# Altium PCB PiMX8MP_r0.3.PcbDoc (part 3 of 10)
Units mm, origin at the board's own origin, x right, y up, seen from the top; angles counter-clockwise.
Board outline 55 x 40 mm, 10 copper layers (Top Layer, Layer 1, Layer 2, Layer 3, Layer 4, Layer 5, Layer 6, Layer 7, Layer 8, Bottom Layer), stack 1.472 mm thick; 545 components, 477 nets, 2606 pads, 2278 vias.
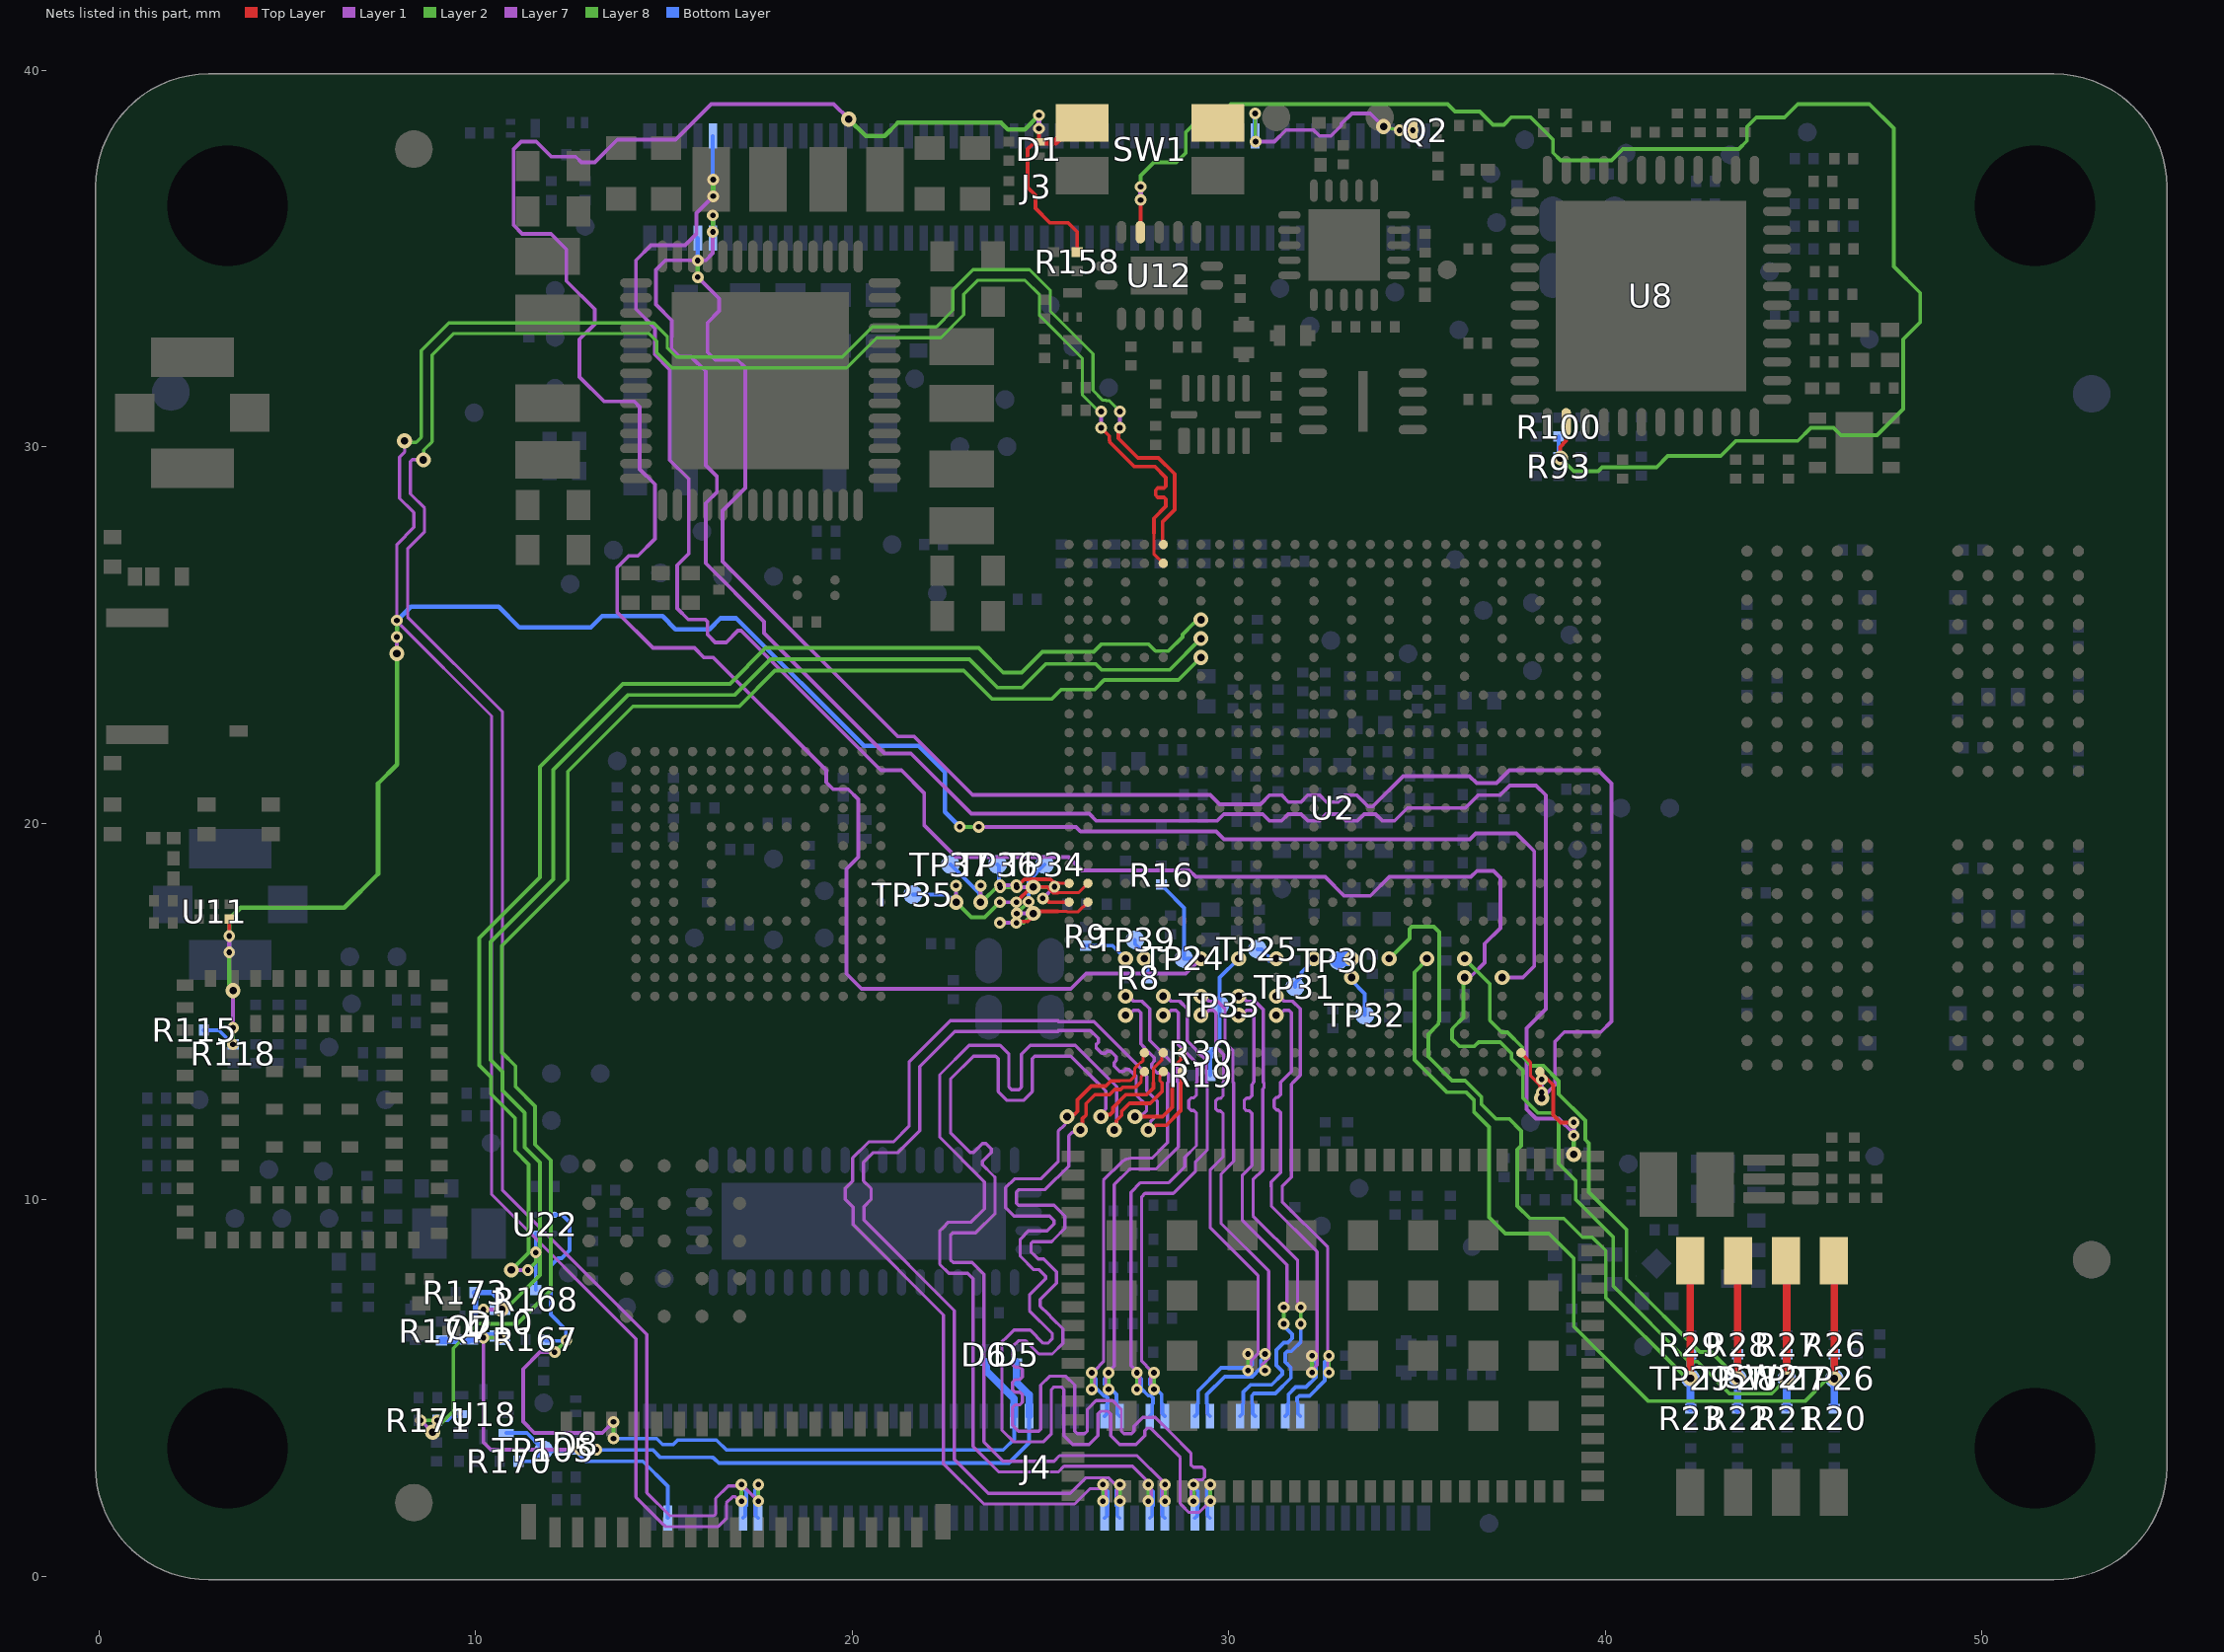
[diagram p11: the nets of this part, all layers, seen from the top]

## Part data (continued)
C24 C34 C35 C36 C37 C38 C41 C42 C43 C44 C45 C46 C47 C50 C51 C52 C53 C54 C55 C56 C58 C61 C62 C63 C65 C66 C67 C68 C70 C71 C72 C74 C75 C76 C77 C78 C79 C80 C83 C84 C85 C86 C87 C88 C89 C92 C93 C94 C95 C96 C97 C98 C99 C101 C102 C103 C104 C107 C108 C117 C118 C119 C120 C123 C124 C125 C126 C127 C128 C131 C132 C133 C134 C135 C136 C137 C138 C139 C140 C141 C142 C143 C144 C145 C146 C147 C148 C149 C150 C151 C152 C153 C154 C155 C156 C157 C158 C159 C160 C161 C162 C163 C164 C167 C175 C180 C182 C192 C195 C197 C198: library part CAP_0201_1uF_6.3V, "Multilayer Ceramic Capacitors MLCC - SMD/SMT 0201 6.3VDC", Manufacturer 1="Murata Electronics", Manufacturer 1 Prt. Nr.=GRM033R60J105MEA2D, Manufacturer 2="Samsung Electro-Mechanics", Manufacturer 2 Prt. Nr.=CL03A105MQ3CSNC
C27 C30 C105 C106 C110 C111 C112 C113 C176 C177: library part CAP_0201_100nF_10V, "Multilayer Ceramic Capacitors MLCC - SMD/SMT 0201 10VDC", Manufacturer 1="Murata Electronics", Manufacturer 1 Prt. Nr.=GRT033R61A104KE01J, Manufacturer 2="Samsung Electro-Mechanics", Manufacturer 2 Prt. Nr.=CL03A104MP3NNNC
C39 C40 C48 C49 C57 C59 C60 C64 C69 C73 C81 C82 C90 C91 C100: library part CAP_0402_10µ_6.3V, "Multilayer Ceramic Capacitors MLCC - SMD/SMT 0402 6.3VDC", Manufacturer 1="KYOCERA AVX", Manufacturer 1 Prt. Nr.=KGM05CS60J106MH, Manufacturer 2=Murata, Manufacturer 2 Prt. Nr.=GRT155C80J106ME13J
C109: library part CAP_0201_15pF_25V, "Multilayer Ceramic Capacitors MLCC - SMD/SMT 0201 25VDC", Manufacturer 1="Murata Electronics", Manufacturer 1 Prt. Nr.=GCM0335C1E150FA16J, Manufacturer 2=KEMET, Manufacturer 2 Prt. Nr.=C0201C150J3GACTU
C114: library part CAP_0201_10nF_25V, "Multilayer Ceramic Capacitors MLCC - SMD/SMT 0201 25VDC", Manufacturer 1="Murata Electronics", Manufacturer 1 Prt. Nr.=GRM033C81E103KE14D, Manufacturer 2=AVX, Manufacturer 2 Prt. Nr.=02013C103KAT2A
C168 C173 C174: library part CAP_0402_OPT, "Optional Capacitor 0402"
C169: library part CAP_0201_OPT, "Optional Capacitor 0201"
C171: library part CAP_0402_1pF_50V, "Multilayer Ceramic Capacitors MLCC - SMD/SMT 0402 50VDC", Manufacturer 1="Murata Electronics", Manufacturer 1 Prt. Nr.=GJM1555C1H1R0BB01J, Manufacturer 2=KEMET, Manufacturer 2 Prt. Nr.=CBR04C109A5GAC
C172: library part CAP_0402_1.2pF_50V, "Multilayer Ceramic Capacitors MLCC - SMD/SMT 0402 50VDC", Manufacturer 1="Murata Electronics", Manufacturer 1 Prt. Nr.=GJM1555C1H1R2CB01D, Manufacturer 2=KEMET, Manufacturer 2 Prt. Nr.=CBR04C129A5GAC
C186: library part CAP_0201_120pF_50V, "Multilayer Ceramic Capacitors MLCC - SMD/SMT 0201 50VDC", Manufacturer 1="Murata Electronics", Manufacturer 1 Prt. Nr.=GRT0335C1H121FA02D, Manufacturer 2 Prt. Nr.=GRM0335C1H121FA01D, Manufacturer 2="Murata Electronics"
C189 C196: library part CAP_0201_470nF_10V, "Multilayer Ceramic Capacitors MLCC - SMD/SMT 0201 10VDC", Manufacturer 1="Taiyo Yuden", Manufacturer 1 Prt. Nr.=LMK063BBJ474KPLF, Manufacturer 2=TDK, Manufacturer 2 Prt. Nr.=C0603X5R1A474M030BC
C193 C194: library part CAP_0201_33nF_10V, "Multilayer Ceramic Capacitors MLCC - SMD/SMT 0201 10VDC", Manufacturer 1="Murata Electronics", Manufacturer 1 Prt. Nr.=GRM033R61A333KE84E, Manufacturer 2=YAGEO, Manufacturer 2 Prt. Nr.=CC0201KRX5R6BB333
D1: library part "ESD Protection Diode_3.3V_VS3V3BA1EST15R", "ESD Diode Suppressors Bidirectional 3.3V working voltage 0201", Manufacturer 1="ROHM Semiconductor", Manufacturer 1 Prt. Nr.=VS3V3BA1EST15R
D2 D4 D7 D10 D11: library part "Schottky 40V_200mA_BAS40L-G3-08", "Schottky Diodes & Rectifiers", Manufacturer 1=Vishay, Manufacturer 1 Prt. Nr.=BAS40L-G3-08
D3 D5 D6 D8 D9: library part "ESD Protection Diode_5V_VS5V0BA1EST15R", "ESD Diode Suppressors Bidirectional 5V working voltage 0201", Manufacturer 1="ROHM Semiconductor", Manufacturer 1 Prt. Nr.=VS5V0BA1EST15R
J1 J2: library part U.FL_CONMHF1-SMD, "U.FL Type Jack PCB SMD RF Connector", Manufacturer 1="Linx Technologies", Manufacturer 1 Prt. Nr.=CONMHF1-SMD
J3 J4: library part "Board to Board Connector_DF40C-100DP-0.4V(51)", "Board to Board connector 100Pol Stacking Header 0.4mm Pitch", Manufacturer 1="Hirose Connector", Manufacturer 1 Prt. Nr.=DF40C-100DP-0.4V(51)
J5: library part "FFC Connector_33pol_FH35C-33S-0.3SHW", "FFC Connector 33pol 0.3mm Pitch Double Sided Contacts", Manufacturer 1="Hirose Connector", Manufacturer 1 Prt. Nr.=FH35C-33S-0.3SHW(99)
J6: library part D-FLOP_SMG-W-2,0x1,2x1,25-AU, "D-type flip-flop with differential output and async set- and reset input", Manufacturer 1=Nexperia, Manufacturer 1 Prt. Nr.=74AUP1G74GT,115
L1 L2 L3 L4 L5 L6 L10: library part "IND_DFE-P 2016_0.47µH_3.7A", "Fixed Inductors DFE-P 2016 0.47uH 3.7A 20% 33mOhms HiCur", Manufacturer 1="Murata Electronics", Manufacturer 1 Prt. Nr.=DFE201612P-R47M=P2
L7 L8: library part BEAD_0201_120Ohm_900mA, "Ferrite Bead 0201 120Ohm 900mA", Manufacturer 1="Murata Electronics", Manufacturer 1 Prt. Nr.=BLM03PX121SN1D
L9: library part IND_LQM21_2.2µH_950mA, "Fixed Inductors LQM21 2.2uH 950mA 20% 180mOhms", Manufacturer 1="Murata Electronics", Manufacturer 1 Prt. Nr.=LQM21PN2R2MGSD
L11 L12 L13: library part BEAD_0201_330Ohm_305mA, "Ferrite Bead 0201 330Ohm 305mA", Manufacturer 1="Murata Electronics", Manufacturer 1 Prt. Nr.=NFZ03SG331SN10D
L14: library part HF_INDC_0201_1.0nH_600mA, "0201 HF Inductor", Manufacturer 1=Abracon, Manufacturer 1 Prt. Nr.=AIMC-06UHQ-1N0B-T, Manufacturer 2=TDK, Manufacturer 2 Prt. Nr.=MLG0603S1N0BTD25
L15: library part HF_INDC_0201_1.2nH_1.1A, "0201 HF Inductor", Manufacturer 1=Abracon, Manufacturer 1 Prt. Nr.=AIMC-06UHQ-1N2B-T, Manufacturer 2=Murata, Manufacturer 2 Prt. Nr.=LQP03HQ1N2C02D
NT1 NT2: library part NetTie_0.2mm, "Net Tie Element"
Q1 Q2 Q3 Q4 Q5 Q7: library part "N-Channel MOSFET_SSM3K15ACT,L3F", "MOSFET 30V SGL N-CH TRENCHMOS Logic Level", Manufacturer 1=Toshiba, Manufacturer 1 Prt. Nr.=SSM3K15ACT,L3F
R1 R2 R20 R21 R22 R23 R31 R32 R33 R34 R35 R36 R42 R43 R44 R45 R48 R51 R112 R123 R124 R125 R127 R128 R136 R137 R138 R139 R140 R141 R142 R143 R144 R145 R146 R147 R149 R150 R158 R159 R186: library part RES_0201_0R_1%, "Thick Film Resistors - SMD 0R OHM 1%", Manufacturer 1=Yageo, Manufacturer 1 Prt. Nr.=RC0201FR-070RL, Manufacturer 2="Vishay / Dale", Manufacturer 2 Prt. Nr.=CRCW02010000Z0ED
R3 R73 R84 R85 R86 R87 R88 R89 R99 R100 R101 R102 R103 R104: library part RES_0201_1k_1%, "Thick Film Resistors - SMD 1K OHM 1%", Manufacturer 1=Yageo, Manufacturer 1 Prt. Nr.=RC0201FR-071KL, Manufacturer 2="Vishay / Dale", Manufacturer 2 Prt. Nr.=CRCW02011K00FNED
R4 R5 R6 R16 R17 R18 R24 R26 R27 R28 R29 R132 R134 R152 R156 R160 R162 R164 R167 R173: library part RES_0201_100k_1%, "Thick Film Resistors - SMD 100K OHM 1%", Manufacturer 1=Yageo, Manufacturer 1 Prt. Nr.=RC0201FR-07100KL, Manufacturer 2="Vishay / Dale", Manufacturer 2 Prt. Nr.=CRCW0201100KFNED
R7 R37 R38 R66 R153 R175 R176: library part RES_0201_4.7k_1%, "Thick Film Resistors - SMD 4.7K OHM 1%", Manufacturer 1=Yageo, Manufacturer 1 Prt. Nr.=RC0201JR-074K7P, Manufacturer 2="Vishay / Dale", Manufacturer 2 Prt. Nr.=CRCW02014K70FNED
R8 R76 R77 R78 R79 R81 R82 R90 R98 R113 R114 R116 R177 R178 R179 R180 R181 R182: library part RES_0201_22R_1%, "Thick Film Resistors - SMD 22R OHM 1%", Manufacturer 1=Yageo, Manufacturer 1 Prt. Nr.=RC0201FR-0722RL, Manufacturer 2="Vishay / Dale", Manufacturer 2 Prt. Nr.=CRCW020122R0FNED
R9: library part RES_0201_402R_1%, "Thick Film Resistors - SMD 402 OHM 1%", Manufacturer 1=Yageo, Manufacturer 1 Prt. Nr.=AC0201FR-07402RL, Manufacturer 2="Vishay / Dale", Manufacturer 2 Prt. Nr.=CRCW0201402RFKED
R10 R25 R30 R40 R49 R50 R52 R53 R58 R59 R60 R61 R62 R63 R64 R65 R67 R68 R69 R70 R71 R72 R74 R75 R92 R93 R94 R95 R96 R97 R107 R108 R109 R110 R111 R115 R118 R119 R120 R121 R131 R135 R148 R151 R154 R155 R157 R161 R163 R165 R168 R171 R172 R183 R185: library part RES_0201_10k_1%, "Thick Film Resistors - SMD 10K OHM 1%", Manufacturer 1=Yageo, Manufacturer 1 Prt. Nr.=RC0201FR-0710KL, Manufacturer 2="Vishay / Dale", Manufacturer 2 Prt. Nr.=CRCW020110K0FNED
R11 R54 R55: library part RES_0201_240R_1%, "Thick Film Resistors - SMD 240 OHM 1%", Manufacturer 1=Yageo, Manufacturer 1 Prt. Nr.=RC0201FR-07240RL, Manufacturer 2="Vishay / Dale", Manufacturer 2 Prt. Nr.=CRCW0201240RFNED
R12 R13 R14 R15: library part RES_0201_2.1k_1%, "Thick Film Resistors - SMD 2.1K OHM 1%", Manufacturer 1=Panasonic, Manufacturer 1 Prt. Nr.=ERJ-1GNF2101C, Manufacturer 2=Yageo, Manufacturer 2 Prt. Nr.=RC0201FR-072K1L
R19: library part RES_0201_2.4k_1%, "Thick Film Resistors - SMD 2.4K OHM 1%", Manufacturer 1=Bourns, Manufacturer 1 Prt. Nr.=CR0201AFW-2401GAS, Manufacturer 2=Yageo, Manufacturer 2 Prt. Nr.=RC0201FR-072K4L
R39 R41: library part RES_0201_8.2k_1%, "Thick Film Resistors - SMD 8.2K OHM 1%", Manufacturer 1=Yageo, Manufacturer 1 Prt. Nr.=RC0201FR-078K2L, Manufacturer 2="Vishay / Dale", Manufacturer 2 Prt. Nr.=CRCW02018K20FNED
R46 R47: library part RES_0201_200R_1%, "Thick Film Resistors - SMD 200 OHM 1%", Manufacturer 1=Yageo, Manufacturer 1 Prt. Nr.=RC0201FR-07200RL, Manufacturer 2="Vishay / Dale", Manufacturer 2 Prt. Nr.=CRCW0201200RFNED
R56 R57: library part RES_0201_150R_1%, "Thick Film Resistors - SMD 150 OHM 1%", Manufacturer 1=Yageo, Manufacturer 1 Prt. Nr.=RC0201FR-07150RL, Manufacturer 2="Vishay / Dale", Manufacturer 2 Prt. Nr.=CRCW0201150RFNED
R80 R83 R122 R126 R129 R133: library part RES_0402_0R_1%, "Thick Film Resistors - SMD 0OHM 1%", Manufacturer 1=Bourns, Manufacturer 1 Prt. Nr.=CR0402AJ/-000GAS, Manufacturer 2=YAGEO, Manufacturer 2 Prt. Nr.=AC0402FR-070RL
R91: library part RES_0201_6.04k_1%, "Thick Film Resistors - SMD 6.04K OHM 1%", Manufacturer 1=Yageo, Manufacturer 1 Prt. Nr.=RC0201FR-076K04L, Manufacturer 2="Vishay / Dale", Manufacturer 2 Prt. Nr.=CRCW02016K04FNED
R105 R106 R169 R170: library part RES_0201_1.8k_1%, "Thick Film Resistors - SMD 1.8K OHM 1%", Manufacturer 1=Panasonic, Manufacturer 1 Prt. Nr.=ERJ-1GNF1801C, Manufacturer 2="Vishay / Dale", Manufacturer 2 Prt. Nr.=CRCW02011K80FKED
R117: library part RES_0201_4.75k_1%, "Thick Film Resistors - SMD 4.75K OHM 1%", Manufacturer 1=Yageo, Manufacturer 1 Prt. Nr.=AC0201FR-074K75L, Manufacturer 2="Vishay / Dale", Manufacturer 2 Prt. Nr.=CRCW02014K75FNED
R130: library part RES_0201_453k_1%, "Thick Film Resistors - SMD 453K OHM 1%", Manufacturer 1=Yageo, Manufacturer 1 Prt. Nr.=RC0201FR-07453KL, Manufacturer 2="Vishay / Dale", Manufacturer 2 Prt. Nr.=CRCW0201453KFKED
R174: library part RES_0201_24k_1%, "Thick Film Resistors - SMD 24K OHM 1%", Manufacturer 1=Yageo, Manufacturer 1 Prt. Nr.=RC0201FR-0724KL, Manufacturer 2="Vishay / Dale", Manufacturer 2 Prt. Nr.=CRCW020124K0FKED
R184: library part RES_0201_12k_1%, "Thick Film Resistors - SMD 12K OHM 1%", Manufacturer 1=Yageo, Manufacturer 1 Prt. Nr.=RC0201FR-0712KL, Manufacturer 2="Vishay / Dale", Manufacturer 2 Prt. Nr.=CRCW020112K0FKED
SW1: library part SW_TACTILE_EVQ-P7J01P, "SMD Switch Tactile SMD 3.2mm X 2.9mm", Manufacturer 1=Panasonic, Manufacturer 1 Prt. Nr.=EVQ-P7J01P
SW2: library part SW_DIP_97C04SRT, "SMD Switch DIP SMD 1.27mm 4 Pos.", Manufacturer 1="Grayhill Inc.", Temperature Range="-40°C - 85°C", Manufacturer 1 Prt. Nr.=97C04SRT
U1: library part "PMIC 6A 5.5V_PCA9450CHN", "5.5V, 6A, Low I Q ,Synchronous Buck Converter PMIC", Manufacturer 1="NXP Semiconductors", Manufacturer 1 Prt. Nr.=PCA9450CHN
U2: library part "SoC_i.MX 8M Plus_Quad", "i.MX 8M Plus Applications Processor  for Industrial Products", Manufacturer 1="NXP Semiconductor", Manufacturer 1 Prt. Nr.=MIMX8ML8CVNKZAB
U3: library part "Quad_Bidirectional_LvL Shift_LSF0204GU12X", "4-bit bidirectional multi-voltage level translator", Manufacturer 1=Nexperia, Temperature Range="-40°C - 125°C", Manufacturer 1 Prt. Nr.=LSF0204GU12X
U4: library part LPDDR4_MT53E1536M32D4DE-046-AIT-C, "DRAM LPDDR4 48G 1.5GX32 FBGA QDP", Manufacturer 1=Micron, Manufacturer 1 Prt. Nr.=MT53E1536M32D4DE-046-AIT-C
U5: library part eMMC_SDINBDG4-16G-I1, "iNAND eMMC 16GB", Manufacturer 1=SanDisk, Manufacturer 1 Prt. Nr.=SDINBDG4-16G-I1
U6: library part NOR_Flash_IS25WP064A-RHLE, "NOR Flash 64Mbit", Manufacturer 1=ISSI, Manufacturer 1 Prt. Nr.=IS25WP064A-RHLE
U7: library part NOR_Flash_W25Q16, "NOR Flash spiFlash, 3V, 16M-bit, 4Kb Uniform Sector, DTR", Manufacturer 1=Winbond, Temperature Range="-40°C - 85°C", Manufacturer 1 Prt. Nr.="W25Q16JVUXIQ TR"
U8: library part "Ethernet Phy 1000Base_LAN8840-V/PSA", "Precision IEEE1588v2 Integrated 10/100/1000M Ethernet precision Transdceiver", Manufacturer 1="Microchip Technology", Temperature Range=-40°C-105°C, Manufacturer 1 Prt. Nr.=LAN8840-V/PSA
U9: library part "LDO 1.1V_TLV73311PQDRVRQ1", "LDO voltage regulator 300mA WSON-6", Manufacturer 1="Texas Instruments", Temperature Range=-40°C-150°C, Manufacturer 1 Prt. Nr.=TLV73311PQDRVRQ1
U10: library part WIFI_BLE_Module_LBEE5PK2BC, "Shielded Ultra Small Wi-Fi® 11a/b/g/n/ac + Bluetooth® 5.2 Module2.4GHz/5GHz Wi-Fi® + Bluetooth® Module", Manufacturer 1=Murata, Temperature Range="-20°C - 70°C", Manufacturer 1 Prt. Nr.=LBEE5PK2BC
U11: library part "RF Analog SW 2:1_BGS12P2L6", "SPDT 2-channel analog multiplexer/demultiplexer EF 6GHz Bandwidth", Manufacturer 1=Infineon, Manufacturer 1 Prt. Nr.=BGS12P2L6E6327XTSA1
U12: library part Hex_Schmitt-Buffer_LvL-Shift_SN74LV6T17, "Hex Schmitt-Trigger Buffer with Integrated Translation", Manufacturer 1="NXP Semiconductors", Manufacturer 1 Prt. Nr.=SN74LV6T17BQAR
U13: library part TPU_Google_Edge_TPU, "Google Coral accelerator module, 4TOPs peak performace, PCIe Gen 2x1 & USB2.0 HS", Manufacturer=Coral, Manufacturer Part Number=G313-06329-00
U14: library part "Buck 4A 5.5V_TLV62595DMQR", "5.5V, 4A, Adjustable ,Synchronous Buck Converter", Manufacturer 1="Texas Instruments", Manufacturer 1 Prt. Nr.=TLV62595DMQR
U15: library part "LDO 1.8V_TLV74018PDQNR", "LDO voltage regulator 300mA X2SON", Manufacturer 1="Texas Instruments", Manufacturer 1 Prt. Nr.=TLV74018PDQNR
U16: library part "High Speed MUX 12x1:2_TS3DV642A0RUAR", "High-speed differential switch 12x2:1 for TMDS and generel LVDS signal switching", Manufacturer 1="Texas Instruments", Manufacturer 1 Prt. Nr.=TS3DV642A0RUAR
U17: library part "Secure Element I2C_SE051", "Secure Element Plug & Trust SE051", Manufacturer 1="NXP Semiconductors", Manufacturer 1 Prt. Nr.=SE051C2HQ1/Z01XDZ
U18: library part "I2C_Bidirectional_LvL Shift_PCA9509GM", "Level SHifter Dual Channel Bidirectional for I2C up to 400kHz", Manufacturer 1="NXP Semiconductors", Manufacturer 1 Prt. Nr.=PCA9509GM,125
U19: library part "MEMS Oscillator_SiTime_SiT1532AI-J4-D14-32.768E", "10 ppm Ultra-Low Power 32.768 kHz XTAL Replacement", Manufacturer 1=SiTime, Manufacturer 1 Prt. Nr.=SiT1532AI-J4-D14-32.768E
U20: library part "MEMS Oscillator_Microchip_DSC1001DI5-024.0000", "1.8V-3.3V Low-Power Precision CMOS Oscillators /  / Stability: ±10 ppm  / Output load: 10pF", Manufacturer 1="Microchip Technology", Manufacturer 1 Prt. Nr.=DSC1001DI5-024.0000
U21: library part "MEMS Oscillator_Microchip_DSC1001DI5-025.0000", "1.8V-3.3V Low-Power Precision CMOS Oscillators /  / Stability: ±10 ppm  / Output load: 10pF", Manufacturer 1="Microchip Technology", Manufacturer 1 Prt. Nr.=DSC1001DI5-025.0000
U22: library part Buffer_SN74LVC1G17YZVR, "Single Buffer SN74LVC1G17DPWR", Manufacturer 1="Texas Instruments", Manufacturer 1 Prt. Nr.=SN74LVC1G17YZVR

## Free pads (board coordinates)
  round 1 smd far side mask+0.5: FD(1.912,31.454) FD(52.912,8.404) FD(52.912,31.404)
  round 1 smd mask+0.5: FD(8.362,37.904) FD(8.362,1.954) FD(52.912,8.404)
  oval 1x1.05 hole 3.2 unplated mask+2.4: MT(3.412,3.404) MT(3.412,36.404) MT(51.412,36.404) MT(51.412,3.404)

## Via types
v1: diameter 0.4, hole 0.2, Top Layer to Bottom Layer, tented both sides, 946 vias
v2: diameter 0.31, hole 0.15, Top Layer to Layer 1, tented both sides, 321 vias
v3: diameter 0.31, hole 0.15, Layer 8 to Bottom Layer, tented both sides, 315 vias
v4: diameter 0.31, hole 0.15, Layer 1 to Layer 2, tented both sides, 257 vias
v5: diameter 0.31, hole 0.15, Layer 7 to Layer 8, tented both sides, 198 vias
v6: diameter 0.4, hole 0.2, Layer 2 to Layer 7, tented both sides, 169 vias
v7: diameter 0.31, hole 0.15, Top Layer to Layer 1, tented top, 72 vias

## Nets (pads, with @x,y where several pads share a name; then routed paths per layer and width w, separated by ;. In a path a pad name is that pad's centre, name@x,y a point inside that pad or via, vN(x,y) a via of type N, cw(c..) or ccw(c..) an arc to the next point about the centre after c; other vN are vias at no path point)
8M_24M_XTALI: R8.1 TP39.TP U2.G25 | length 1.1
  Bottom Layer w0.1: TP39.TP@27.512,16.904 27.512,16.796 27.705,16.604 27.705,16.462 v1(27.762,16.404) ; v1@27.75,16.4 27.75,16.335 27.85,16.235 R8.1@27.85,15.9
8M_24M_XTALO: R9.1 U2.G26 | length 1.3
  Bottom Layer w0.1: R9.1@26.118,16.75 26.917,16.75 v1(27.262,16.404)
8M_BOOT_MODE0: R20.1 R26.2 SW2.5 TP26.TP U2.G10 | length 24.8
  Top Layer w0.2: v1(46.086,5.25) SW2.5@46.086,8.086
  Layer 2 w0.1: v1(35.262,16.404) 35.262,16.371 34.932,16.041 34.932,13.718 35.796,12.854 36.307,12.854 36.512,12.649 36.512,12.335 36.917,11.93 36.917,9.533 37.346,9.104 38.507,9.104 39.162,8.449 39.162,6.638 41.15,4.65 45.3,4.65 45.845,5.195 v1@46.095,5.195
  Bottom Layer w0.2: R20.1@46.086,4.514 v1(46.086,5.25) R26.2@46.086,5.9
8M_BOOT_MODE1: J3.93 R21.1 R27.2 SW2.6 TP27.TP U2.F8 | length 65.5
  Top Layer w0.2: v1(44.818,5.25) SW2.6@44.818,8.132
  Layer 2 w0.1: v1(36.262,15.904) 36.232,15.874 36.232,14.841 35.952,14.561 35.952,14.543 35.932,14.523 35.932,14.268 36.126,14.074 36.524,14.074 36.639,14.189 37.211,14.189 37.511,13.889 37.511,13.739 37.812,13.438 37.812,12.704 38.212,12.304 38.562,12.304 38.762,12.104 38.762,10.954 39.212,10.504 39.212,10.004 40.212,9.004 40.212,7.704 42.217,5.7 42.45,5.7 43.3,4.85 44.418,4.85 v1(44.818,5.25)
  Layer 7 w0.1: v5(16.312,36.654) 15.862,36.204 15.862,35.654 15.562,35.354 14.662,35.354 14.262,34.954 14.262,33.655 14.762,33.154 14.762,32.454 15.162,32.054 15.162,29.645 15.662,29.145 15.662,27.164 15.352,26.854 15.352,25.71 15.651,25.412 16.104,25.412 16.162,25.353 16.162,25.009 16.367,24.804 16.657,24.804 16.968,25.116 17.051,25.116 20.762,21.404 21.312,21.404 21.912,20.804 21.912,19.954 22.762,19.104 25.462,19.104 25.746,19.104 26.1,18.75 28.95,18.75 29.126,18.574 32.562,18.574 33.062,18.074 33.762,18.074 34.262,18.574 36.432,18.574 36.592,18.734 37.032,18.734 37.212,18.554 37.212,17.212 36.8,16.8 36.8,16.3 36.462,15.962 36.32,15.962 v1(36.262,15.904)
  Layer 8 w0.12: v5(16.312,36.654) v3(16.312,37.094)
  Bottom Layer w0.1: v3@16.3,37.1 16.3,38.252 J3.93@16.302,38.254
  Bottom Layer w0.2: R21.1@44.818,4.468 v1(44.818,5.25) ; TP27.TP@44.818,5.232 R27.2@44.818,5.9
8M_BOOT_MODE2: R22.1 R28.2 SW2.7 TP28.TP U2.G8 | length 18.9
  Top Layer w0.2: v1(43.517,5.25) SW2.7@43.517,8.117
  Layer 2 w0.1: v1(36.262,16.404) 36.932,15.734 36.932,14.768 37.126,14.574 37.25,14.45 37.4,14.45 37.8,14.05 37.8,13.8 38.046,13.554 38.362,13.554 38.762,13.154 38.762,12.804 39.467,12.099 39.467,11.599 39.562,11.504 39.562,10.204 40.562,9.204 40.562,7.904 42.512,5.954 42.812,5.954 v1(43.517,5.25)
  Bottom Layer w0.2: R22.1@43.517,4.417 v1(43.517,5.25) ; TP28.TP@43.517,5.317 R28.2@43.517,5.9
8M_BOOT_MODE3: R23.1 R29.2 SW2.8 TP29.TP U2.G12 | length 22.6
  Top Layer w0.2: v1@42.257,5.207 SW2.8@42.257,8.379
  Layer 2 w0.1: v1(34.262,16.404) 34.8,16.942 34.8,17.191 34.859,17.25 35.45,17.25 35.592,17.108 35.592,14.747 35.57,14.725 35.57,14.67 35.3,14.4 35.3,13.8 35.935,13.165 36.279,13.165 36.712,12.732 36.712,12.538 37.101,12.149 37.449,12.149 37.767,11.831 37.767,11.437 37.662,11.332 37.662,9.838 38,9.5 38.9,9.5 39.396,9.004 39.657,9.004 40.012,8.649 40.012,7.399 42.062,5.349 42.086,5.349 42.185,5.25 v1@42.25,5.25
  Bottom Layer w0.2: R23.1@42.262,4.462 v1(42.262,5.254) R29.2@42.262,5.888
8M_CLKIN1: TP34.TP U2.K28 | length 5.6
  Top Layer w0.08: 25.462,17.659 25.702,17.659 25.712,17.649 26.007,17.649 U2.K28@26.262,17.904
  Top Layer w0.1: v2(24.362,17.354) 24.399,17.391 24.667,17.391 24.936,17.659 25.462,17.659
  Layer 1 w0.1: v4(23.922,17.354) v2(24.362,17.354)
  Layer 2 w0.1: v4(23.922,17.354) 24.562,17.354 v6(24.812,17.604)
  Layer 7 w0.1: v5(24.372,17.604) v6(24.812,17.604)
  Layer 8 w0.1: v5(24.372,17.604) v3(24.683,17.916)
  Bottom Layer w0.1: v3(24.683,17.916) 24.683,18.476 TP34.TP@25.112,18.904
8M_CLKIN2: TP35.TP U2.L28 | length 6.3
  Top Layer w0.08: 25.462,18.159 26.017,18.159 U2.L28@26.262,18.404
  Top Layer w0.1: v2(24.362,17.904) 24.767,18.309 25.189,18.309 25.339,18.159 25.462,18.159
  Layer 1 w0.1: v4(23.922,17.904) v2(24.362,17.904)
  Layer 2 w0.1: v6(22.762,17.904) 23.162,17.504 23.522,17.504 v4(23.922,17.904)
  Layer 7 w0.1: v6(22.762,17.904) v5(22.762,18.344)
  Layer 8 w0.1: v6(22.762,17.904) v5(22.762,18.344)
  Bottom Layer w0.1: TP35.TP@21.612,18.104 22.531,18.104 22.731,17.904 v6(22.762,17.904)
  other v3: 22.762,17.904
8M_CLKOUT1: TP36.TP U2.K29 | length 3.3
  Top Layer w0.1: v2(25.062,18.004) 25.119,18.004 25.219,17.904 U2.K29@25.762,17.904
  Layer 1 w0.1: v2(25.062,18.004) v4(25.373,18.316)
  Layer 2 w0.1: v6(24.812,18.304) 24.818,18.31 25.368,18.31 v4(25.373,18.316)
  Layer 7 w0.1: v5(24.372,18.304) v6(24.812,18.304)
  Layer 8 w0.1: v3(23.932,18.304) v5(24.372,18.304)
  Bottom Layer w0.1: TP36.TP@23.862,18.904 23.897,18.869 23.897,18.339 v3(23.932,18.304)
8M_CLKOUT2: TP37.TP U2.L29 | length 4.9
  Top Layer w0.08: 25.462,18.404 U2.L29@25.762,18.404
  Top Layer w0.1: v2(24.362,18.354) 24.419,18.354 24.574,18.509 25.271,18.509 25.376,18.404 25.462,18.404
  Layer 1 w0.1: v4(23.922,18.354) v2(24.362,18.354)
  Layer 2 w0.1: v6(23.412,17.904) 23.442,17.904 23.892,18.354 v4(23.922,18.354)
  Layer 7 w0.1: v6(23.412,17.904) v5(23.412,18.344)
  Layer 8 w0.1: v6(23.412,17.904) v5(23.412,18.344)
  Bottom Layer w0.1: TP37.TP@22.612,18.904 23.372,18.145 23.372,17.945 v6(23.412,17.904)
  other v3: 23.412,17.904
8M_JTAG_MOD: R19.1 R30.2 TP33.TP U2.G20 | length 3.4
  Bottom Layer w0.1: R19.1@29.512,13.304 R30.2@29.512,13.904 29.512,13.919 29.762,14.169 TP33.TP@29.762,15.162 29.762,15.904 v1(30.262,16.404)
8M_JTAG_TCK: TP25.TP U2.G18 | length 0.8
  Bottom Layer w0.1: TP25.TP@30.762,16.654 30.87,16.654 31.063,16.462 31.205,16.462 v1(31.262,16.404) 31.205,16.347 31.063,16.347
8M_JTAG_TDI: TP31.TP U2.G16 | length 1
  Bottom Layer w0.1: TP31.TP@31.762,15.654 31.762,15.763 31.932,15.933 31.932,16.041 32.262,16.371 v1(32.262,16.404)
8M_JTAG_TDO: TP32.TP U2.F14 | length 1.1
  Bottom Layer w0.1: v1(33.262,15.904) 33.262,15.823 33.612,15.473 TP32.TP@33.612,14.904
8M_JTAG_TMS: TP30.TP U2.G14 | length 0.4
  Bottom Layer w0.4: TP30.TP@32.912,16.354 32.939,16.354 32.989,16.404 v1(33.262,16.404)
8M_ONOFF: D1.2 R16.1 R158.2 SW1.2 TP24.TP U2.G22 | length 63.3
  Top Layer w0.1: v2(24.962,38.454) D1.2@24.962,38.094 24.912,38.044 24.802,38.044 24.662,37.904 24.662,36.888 24.867,36.683 24.867,36.333 25.25,35.95 25.732,35.95 25.978,35.704 R158.2@25.978,35.169
  Top Layer w0.2: D1.2@24.962,38.094 25.402,38.094 25.912,38.604 SW1.2@26.112,38.604
  Layer 1 w0.12: v2(24.962,38.454) v4(24.962,38.804)
  Layer 2 w0.12: v6(19.912,38.704) 20.362,38.254 20.862,38.254 21.212,38.604 23.962,38.604 24.137,38.429 24.587,38.429 v4(24.962,38.804)
  Layer 7 w0.1: v6(19.912,38.704) 19.512,39.104 17.557,39.104 16.262,39.104 15.312,38.154 13.762,38.154 13.162,37.554 12.812,37.554 12.662,37.704 12.012,37.704 11.612,38.104 11.212,38.104 11.012,37.904 11.012,35.885 11.242,35.654 12.007,35.654 12.16,35.502 12.412,35.249 12.412,34.404 13.162,33.654 13.162,33.254 12.762,32.854 12.762,31.854 13.412,31.204 14.212,31.204 14.362,31.054 14.362,29.404 14.762,29.004 14.762,27.554 14.312,27.104 14.072,27.104 13.762,26.794 13.762,25.604 14.712,24.654 15.812,24.654 16.062,24.404 16.312,24.404 19.312,21.404 19.312,21.088 19.496,20.904 19.896,20.904 20.162,20.638 20.162,19.1 19.85,18.788 19.85,16 20.25,15.6 20.65,15.6 25.808,15.6 26.212,16.004 28.862,16.004 v1(29.262,16.404)
  Bottom Layer w0.1: R16.1@28.212,18.374 28.227,18.374 28.312,18.289 28.312,18.254 28.812,17.754 TP24.TP@28.812,16.404 v1(29.262,16.404)
ACT_LED_FET: R93.1 R100.2 U8.14 U12.5 | length 44.4
  Top Layer w0.1: U12.5@27.653,35.699 27.662,35.708 v2(27.662,36.554) ; v1(38.812,29.704) 38.799,29.718 38.799,29.996 38.962,30.159 U8.14@38.962,30.654
  Layer 1 w0.12: v2(27.662,36.554) v4(27.662,36.904)
  Layer 2 w0.1: v4(27.662,36.904) 27.662,37.204 28.012,37.554 28.612,37.554 28.862,37.804 28.862,38.354 29.212,38.704 29.662,38.704 30.062,39.104 35.812,39.104 36.01,38.907 36.665,38.907 37.017,38.554 37.307,38.554 37.507,38.754 38.015,38.754 38.612,38.157 38.612,37.809 38.817,37.604 40.162,37.604 40.462,37.904 43.542,37.904 43.763,38.126 43.763,38.208 43.762,38.209 43.762,38.499 44.012,38.749 44.757,38.749 45.112,39.104 47.012,39.104 47.659,38.458 47.659,37.359 47.659,36.259 47.662,36.256 47.662,34.787 48.362,34.087 48.362,33.304 47.912,32.854 47.912,31.004 47.212,30.304 46.262,30.304 46.062,30.504 45.462,30.504 45.112,30.154 43.467,30.154 43.067,29.754 41.662,29.754 41.362,29.454 39.912,29.454 39.812,29.354 39.162,29.354 v1(38.812,29.704)
  Bottom Layer w0.1: R100.2@38.762,30.274 R93.1@38.762,29.724 38.792,29.724 v1(38.812,29.704)
ACTIVITY_LED_EXT: J3.21 Q2.3 | length 6.2
  Layer 1 w0.12: v4(34.537,38.404) v2(34.887,38.404)
  Layer 2 w0.1: v6(34.112,38.504) 34.129,38.488 34.14,38.488 v4(34.537,38.404)
  Layer 7 w0.1: v5(30.712,38.104) 31.212,38.104 31.522,38.414 32.252,38.414 32.412,38.254 32.712,38.254 32.99,38.532 32.99,38.577 33.267,38.854 33.762,38.854 v6(34.112,38.504)
  Layer 8 w0.1: v3(30.702,38.854) 30.707,38.849 30.707,38.109 v5(30.712,38.104)
  Bottom Layer w0.12: J3.21@30.702,38.254 v3(30.702,38.854)
ANALOG_P1: J3.94 U2.A4 | length 51.8
  Top Layer w0.08: U2.A4@38.262,13.404 38.562,13.104
  Top Layer w0.1: 38.562,13.104 38.617,13.049 38.617,12.249 38.812,12.054 v2(39.162,12.054)
  Layer 1 w0.12: v4(39.162,11.704) v2@39.162,11.954
  Layer 2 w0.12: v6(39.162,11.204) v4(39.162,11.704)
  Layer 7 w0.1: v5(16.302,35.704) 16.302,35.144 16.112,34.954 15.04,34.954 14.787,34.702 14.787,33.779 15.212,33.354 15.212,32.914 15.202,32.904 15.202,32.605 15.413,32.394 15.722,32.394 16.112,32.004 16.112,29.504 16.412,29.204 16.412,28.804 16.112,28.504 16.112,26.904 17.662,25.354 17.662,25.054 20.562,22.154 20.862,21.854 21.562,21.854 23.162,20.254 25.462,20.254 26.296,20.254 26.486,20.064 29.691,20.064 29.871,20.244 30.903,20.244 31.083,20.064 31.403,20.064 31.583,20.244 31.922,20.244 32.102,20.064 32.413,20.064 32.593,20.244 32.927,20.244 33.107,20.064 33.415,20.064 33.595,20.244 33.903,20.244 34.083,20.064 34.403,20.064 34.743,20.404 36.281,20.404 36.621,20.744 37.202,20.744 37.462,21.004 38.162,21.004 38.422,20.744 38.422,15.064 37.912,14.554 37.912,12.404 38.162,12.154 38.762,12.154 39.162,11.754 v6(39.162,11.204)
  Layer 8 w0.12: v5(16.302,35.704) v3(16.302,36.144)
  Bottom Layer w0.12: J3.94@16.302,35.544 v3(16.302,36.144)
ANALOG_P2: J3.96 U2.B5 | length 49.2
  Top Layer w0.08: U2.B5@37.762,13.904 38.012,13.654 38.012,13.3 38.137,13.175 38.137,13.172 38.205,13.104
  Top Layer w0.1: 38.205,13.104 38.272,13.037 38.272,12.89 v2(38.312,12.849)
  Layer 1 w0.12: v2@38.312,12.949 v4(38.312,13.199)
  Layer 2 w0.12: v6(38.312,12.699) v4(38.312,13.199)
  Layer 7 w0.1: v5(15.902,34.504) 16.472,33.934 16.472,33.605 16.162,33.295 16.162,32.504 16.362,32.304 16.962,32.304 17.162,32.104 17.162,28.904 16.562,28.304 16.562,26.954 21.212,22.304 21.646,22.304 23.2,20.75 25.462,20.75 28.1,20.75 ; 28.117,20.754 29.512,20.754 29.762,20.504 30.843,20.504 31.083,20.744 31.408,20.744 31.588,20.564 31.917,20.564 32.097,20.744 32.416,20.744 32.596,20.564 32.91,20.564 33.09,20.744 33.403,20.744 33.703,20.444 33.821,20.444 34.631,21.254 36.393,21.254 36.583,21.064 37.113,21.064 37.453,21.404 39.812,21.404 40.162,21.054 40.162,14.735 39.881,14.454 38.912,14.454 38.662,14.204 38.662,13.049 v6(38.312,12.699)
  Layer 8 w0.12: v5(15.902,34.504) v3(15.902,34.944)
  Bottom Layer w0.12: v3(15.902,34.944) J3.96@15.902,35.544
ANT_SEL: R115.2 R118.2 U2.F6 U11.6 | length 54.9
  Top Layer w0.1: v2(3.462,17.004) U11.6@3.462,17.454
  Layer 1 w0.12: v4(3.462,16.572) v2(3.462,17.004)
  Layer 2 w0.12: v6(3.562,15.554) 3.462,15.654 v4(3.462,16.572) 3.462,17.454 3.762,17.754 6.512,17.754 7.412,18.654 7.412,21.054 7.912,21.554 v6(7.912,24.504)
  Layer 7 w0.1: v5(3.562,14.569) v6(3.562,15.554) ; v6(7.912,24.504) v5(7.912,24.944) ; v5(23.362,19.904) 25.462,19.904 25.946,19.904 26.067,19.783 29.667,19.783 29.876,19.574 36.399,19.574 36.559,19.734 37.632,19.734 38.112,19.254 38.112,16.204 37.812,15.904 v1(37.262,15.904)
  Layer 8 w0.1: v3(3.562,14.129) v5(3.562,14.569) ; v3(22.86,19.907) v3@22.862,19.904 ; v3@22.865,19.902 v3@22.862,19.904 ; v5(23.362,19.904) v3@22.862,19.904
  Layer 8 w0.12: v5(7.912,24.944) v3(7.912,25.384)
  Bottom Layer w0.1: R115.2@2.787,14.504 3.187,14.504 3.462,14.229 3.462,14.214 3.547,14.129 v3(3.562,14.129)
  Bottom Layer w0.12: v3(7.912,25.384) 8.282,25.754 10.612,25.754 11.162,25.204 13.062,25.204 13.362,25.504 13.958,25.504 13.963,25.499 14.967,25.499 15.312,25.154 16.212,25.154 16.502,25.444 16.922,25.444 20.312,22.054 21.762,22.054 22.462,21.354 22.462,20.304 v3(22.86,19.907)
BB_CON_CAM0_CLK_N: J4.40 U2.B23 | length 30.4
  Top Layer w0.08: 28.497,13.104 28.507,13.114 28.507,13.496 28.73,13.718 28.73,13.872 U2.B23@28.762,13.904
  Top Layer w0.1: v1(27.509,12.208) 28.246,12.208 28.497,12.46 28.497,13.104
  Layer 7 w0.085: 25.462,14.469 22.727,14.469 21.797,13.539 21.797,11.832 21.22,11.254 20.562,11.254 20.3,10.992 20.3,10.501 20.505,10.296 20.505,10.013 20.312,9.82 20.312,9.458 22.712,7.058 22.712,3.108 23.615,2.204 25.79,2.204 26.198,2.612 26.813,2.612 27.03,2.395 27.03,2.138 27.112,2.055 v5(27.112,1.994) ; v1(27.509,12.208) 27.568,12.267 27.72,12.267 27.82,12.367 27.82,12.501 27.543,12.778 27.543,13.104
  Layer 7 w0.09: 25.462,14.469 25.485,14.492 26.205,14.492 26.325,14.492 26.537,14.28 26.537,14.184 26.482,14.129 26.482,14.032 26.626,13.888 26.722,13.888 26.777,13.943 26.874,13.943 27.018,13.799 27.018,13.703 26.963,13.648 26.963,13.552 27.107,13.407 27.203,13.407 27.258,13.462 27.354,13.462 27.38,13.436 27.412,13.404 27.543,13.274 27.543,13.104
  Layer 8 w0.1: v5(27.112,1.994) v3(27.112,2.434)
  Bottom Layer w0.1: 27.017,2.283 27.017,1.883 27.037,1.863 27.037,1.609 J4.40@27.102,1.544
BB_CON_CAM0_CLK_P: J4.42 U2.A23 | length 30.7
  Top Layer w0.08: 28.737,13.104 28.737,13.343 28.762,13.368 U2.A23@28.762,13.404
  Top Layer w0.1: v1(27.862,11.854) 27.943,11.854 28.067,11.978 28.341,11.978 28.727,12.364 28.727,13.078 28.737,13.088 28.737,13.104
  Layer 7 w0.085: 25.462,14.754 22.894,14.754 22.609,14.754 21.512,13.658 21.512,11.95 21.102,11.539 20.444,11.539 20.015,11.11 20.015,10.497 19.82,10.302 19.82,10.013 20.027,9.805 20.027,9.339 22.427,6.939 22.427,2.989 23.497,1.919 25.908,1.919 26.316,2.327 26.695,2.327 26.745,2.277 26.745,2.138 26.662,2.055 v5(26.662,1.994) ; 27.828,13.104 27.828,12.896 28.105,12.62 28.105,12.249 27.922,12.066 27.922,11.914 v1(27.862,11.854)
  Layer 7 w0.09: 25.462,14.754 25.485,14.732 26.424,14.732 27.783,13.373 27.783,13.319 27.828,13.274 27.828,13.104
  Layer 8 w0.1: v5(26.662,1.994) v3(26.662,2.434)
  Bottom Layer w0.1: v3(26.662,2.434) 26.662,2.381 26.787,2.256 26.787,1.883 26.767,1.863 26.767,1.609 J4.42@26.702,1.544
BB_CON_CAM0_D0_N: J4.28 U2.B25 | length 29.7
  Top Layer w0.08: 27.102,13.159 27.378,13.159 27.507,13.289 27.507,13.496 27.661,13.649 27.683,13.649 27.73,13.696 27.73,13.872 U2.B25@27.762,13.904
  Top Layer w0.1: v1(25.709,12.208) 25.766,12.265 25.901,12.265 25.982,12.347 25.982,12.65 26.352,13.02 26.738,13.02 26.878,13.159 27.102,13.159
  Layer 7 w0.085: 25.29,4.674 25.29,4.388 ; 25.648,11.996 25.469,11.817 25.469,11.012 25.012,10.554 24.309,10.554 24.077,10.323 24.077,9.786 24.294,9.569 25.247,9.569 25.362,9.454 25.362,9.354 25.18,9.172 25.029,9.172 24.682,9.172 24.465,8.955 24.465,8.499 24.82,8.143 24.97,8.143 25.141,7.972 25.141,7.902 24.711,7.471 24.711,7.056 25.312,6.454 25.312,6.304 25.197,6.189 25.077,6.189 24.727,6.539 24.294,6.539 24.111,6.356 23.977,6.223 23.977,3.886 24.294,3.569 25.073,3.569 25.29,3.786 25.29,4.388 ; v5(29.512,1.994) 29.215,1.697 28.939,1.697 28.765,1.871 28.765,1.877 28.712,1.93 28.712,3.154 28.408,3.458 27.932,3.935 27.837,3.935 27.77,3.868 27.77,3.735 27.536,3.501 27.099,3.501 26.865,3.735 26.865,4.315 26.798,4.382 26.597,4.382 26.53,4.315 26.53,3.735 26.296,3.501 25.859,3.501 25.625,3.735 25.625,4.96 25.558,5.027 25.357,5.027 25.29,4.96 25.29,4.388
  Layer 8 w0.1: v5(29.512,1.994) v3(29.512,2.434)
  Bottom Layer w0.1: 29.417,2.283 29.417,1.883 29.437,1.863 29.437,1.609 J4.28@29.502,1.544
BB_CON_CAM0_D0_P: J4.30 U2.A25 | length 29.8
  Top Layer w0.08: 27.648,13.104 27.677,13.134 27.677,13.273 27.762,13.358 U2.A25@27.762,13.404
  Top Layer w0.1: v1(26.062,11.854) 26.114,11.906 26.114,12.153 26.212,12.251 26.212,12.554 26.447,12.79 26.833,12.79 26.973,12.929 27.127,12.929 27.187,12.989 27.533,12.989 27.648,13.104
  Layer 7 w0.085: 25.005,4.506 25.005,4.792 ; v1(26.062,11.854) 26.002,11.794 25.85,11.794 25.754,11.699 25.754,10.894 25.13,10.269 24.427,10.269 24.362,10.204 24.362,9.904 24.412,9.854 25.365,9.854 25.506,9.713 25.647,9.573 25.647,9.236 25.381,8.97 25.298,8.887 25.147,8.887 24.8,8.887 24.75,8.837 24.75,8.617 24.862,8.504 24.938,8.428 25.088,8.428 25.426,8.09 25.426,7.784 24.996,7.353 24.996,7.174 25.213,6.957 25.314,6.856 25.597,6.573 25.597,6.186 25.315,5.904 24.959,5.904 24.711,6.153 24.609,6.254 24.412,6.254 24.262,6.104 24.262,5.704 24.262,5.626 24.329,5.559 24.458,5.559 24.525,5.492 24.525,5.291 24.458,5.224 24.329,5.224 24.262,5.157 24.262,4.956 24.329,4.889 24.458,4.889 24.525,4.822 24.525,4.621 24.458,4.554 24.329,4.554 24.262,4.487 24.262,4.11 24.262,4.004 24.412,3.854 24.955,3.854 25.005,3.904 25.005,4.792 ; v5(29.062,1.994) 29.019,2.038 29.019,2.135 28.997,2.157 28.997,2.221 28.997,2.493 29.064,2.56 29.293,2.56 29.36,2.627 29.36,2.828 29.293,2.895 29.064,2.895 28.997,2.962 28.997,3.004 28.997,3.273 28.462,3.808 28.05,4.22 27.719,4.22 27.485,3.986 27.485,3.853 27.418,3.786 27.217,3.786 27.15,3.853 27.15,4.433 26.916,4.667 26.479,4.667 26.245,4.433 26.245,3.853 26.178,3.786 25.977,3.786 25.91,3.853 25.91,5.078 25.676,5.312 25.239,5.312 25.005,5.078 25.005,4.792
  Layer 8 w0.1: v5(29.062,1.994) v3(29.062,2.434)
  Bottom Layer w0.1: v3(29.062,2.434) 29.062,2.381 29.187,2.256 29.187,1.883 29.167,1.863 29.167,1.609 J4.30@29.102,1.544
BB_CON_CAM0_D1_N: J4.34 U2.B24 | length 29.8
  Top Layer w0.08: 28,13.104 28,13.137 28.007,13.145 28.007,13.496 28.23,13.718 28.23,13.872 U2.B24@28.262,13.904
  Top Layer w0.1: v1(26.609,12.208) 26.661,12.26 26.852,12.26 26.929,12.337 26.929,12.448 27.27,12.789 27.822,12.789 28,12.967 28,13.104
  Layer 7 w0.085: 25.462,13.816 24.976,13.816 24.85,13.816 24.783,13.749 24.783,12.873 24.549,12.639 24.112,12.639 23.878,12.873 23.878,13.749 23.811,13.816 23.226,13.816 23.224,13.816 22.612,13.204 22.612,11.778 22.674,11.716 22.999,11.391 23.13,11.26 23.225,11.26 23.46,11.495 23.554,11.495 23.696,11.352 23.696,11.258 23.462,11.023 23.462,10.928 23.729,10.662 23.797,10.593 23.797,9.639 23.277,9.119 22.677,9.119 22.612,9.054 22.612,8.404 22.685,8.332 23.188,8.332 23.497,8.023 23.497,3.569 24.011,3.056 25.361,3.056 25.509,3.204 27.565,3.204 28.23,2.54 28.23,2.138 28.312,2.055 v5(28.312,1.994) ; 26.522,13.104 26.737,12.889 26.737,12.415 26.609,12.286 v1(26.609,12.208)
  Layer 7 w0.09: 25.462,13.816 25.81,13.816 26.522,13.104
  Layer 8 w0.1: v5(28.312,1.994) v3(28.312,2.434)
  Bottom Layer w0.1: 28.217,2.283 28.217,1.883 28.237,1.863 28.237,1.609 J4.34@28.302,1.544
BB_CON_CAM0_D1_P: J4.36 U2.A24 | length 30.1
  Top Layer w0.08: 28.23,13.104 28.182,13.152 28.167,13.167 28.167,13.273 28.262,13.368 U2.A24@28.262,13.404
  Top Layer w0.1: v1(26.962,11.854) 27.014,11.906 27.014,12.097 27.159,12.242 27.159,12.353 27.365,12.559 27.917,12.559 28.23,12.872 28.23,13.104
  Layer 7 w0.085: 25.462,14.101 24.976,14.101 24.732,14.101 24.498,13.867 24.498,12.991 24.431,12.924 24.23,12.924 24.163,12.991 24.163,13.867 23.929,14.101 23.226,14.101 23.106,14.101 22.327,13.323 22.327,11.66 23.512,10.475 23.512,9.758 23.159,9.404 22.559,9.404 22.411,9.256 22.327,9.173 22.327,8.286 22.567,8.047 23.07,8.047 23.212,7.904 23.212,3.451 23.893,2.771 25.479,2.771 25.627,2.919 27.447,2.919 27.662,2.704 27.945,2.422 27.945,2.138 27.862,2.055 v5(27.862,1.994) ; 26.723,13.306 27.022,13.007 27.022,11.915 v1(26.962,11.854)
  Layer 7 w0.09: 25.462,14.101 25.928,14.101 26.723,13.306
  Layer 8 w0.1: v5(27.862,1.994) v3(27.862,2.434)
  Bottom Layer w0.1: v3(27.862,2.434) 27.862,2.381 27.987,2.256 27.987,1.883 27.967,1.863 27.967,1.609 J4.36@27.902,1.544
BB_CON_CAM1_CLK_N: J4.27 U2.E22 | length 14.4
  Layer 7 w0.085: 30.135,13.104 30.135,11.024 29.797,10.686 29.797,9.373 31.062,8.108 31.062,5.79 30.88,5.608 30.962,5.525 v5(30.962,5.464)
  Layer 7 w0.09: v1(29.262,15.404) 29.34,15.404 29.47,15.274 29.697,15.274 29.902,15.069 29.902,14.164 30.112,13.954 30.112,13.733 30.112,13.127 30.135,13.104
  Layer 8 w0.1: v5(30.962,5.464) v3(30.962,5.904)
  Bottom Layer w0.1: J4.27@29.502,4.254 29.437,4.319 29.437,4.573 29.417,4.593 29.417,4.827 29.895,5.304 30.622,5.304 30.852,5.535 30.852,5.741 30.962,5.851 v3(30.962,5.904)
BB_CON_CAM1_CLK_P: J4.29 U2.D22 | length 14.3
  Layer 7 w0.085: 29.85,13.104 29.85,12.954 29.85,12.759 29.783,12.692 29.717,12.692 29.65,12.625 29.65,12.424 29.717,12.357 29.783,12.357 29.85,12.29 29.85,12.247 29.85,11.142 29.512,10.804 29.512,9.254 30.777,7.989 30.777,5.908 30.595,5.726 30.595,5.608 30.512,5.525 v5(30.512,5.464)
  Layer 7 w0.09: v1(29.262,14.904) 29.34,14.904 29.47,15.034 29.597,15.034 29.662,14.969 29.662,14.065 29.872,13.855 29.872,13.833 29.872,13.127 29.85,13.104
  Layer 8 w0.1: v5(30.512,5.464) v3(30.512,5.904)
  Bottom Layer w0.1: J4.29@29.102,4.254 29.167,4.319 29.167,4.573 29.187,4.593 29.187,4.922 29.8,5.534 30.526,5.534 30.622,5.63 30.622,5.738 30.512,5.848 v3(30.512,5.904)
BB_CON_CAM1_D0_N: J4.15 U2.E18 | length 13.7
  Layer 7 w0.085: 31.699,13.104 31.662,13.068 31.662,10.601 31.42,10.359 31.42,9.947 32.63,8.736 32.63,5.446 v5(32.662,5.414)
  Layer 7 w0.09: v1(31.262,15.404) 31.34,15.404 31.47,15.274 31.697,15.274 31.902,15.069 31.902,13.308 31.699,13.104
  Layer 8 w0.1: v5(32.662,5.414) v3(32.662,5.854)
  Bottom Layer w0.1: J4.15@31.902,4.254 31.837,4.319 31.837,4.632 31.817,4.652 31.817,4.734 31.876,4.793 32.151,4.793 32.552,5.194 32.552,5.691 32.662,5.801 v3(32.662,5.854)
BB_CON_CAM1_D0_P: J4.17 U2.D18 | length 13.6
  Layer 7 w0.085: 31.129,10.354 31.129,10.471 31.377,10.719 31.377,12.277 31.377,12.32 31.31,12.387 31.272,12.387 31.205,12.454 31.205,12.655 31.272,12.722 31.31,12.722 31.377,12.789 31.377,12.904 31.377,13.104 ; 31.135,10.354 31.135,9.829 32.345,8.618 32.345,5.609 32.212,5.475 v5(32.212,5.414)
  Layer 7 w0.09: v1(31.262,14.904) 31.34,14.904 31.47,15.034 31.597,15.034 31.662,14.969 31.662,13.408 31.377,13.123 31.377,13.104
  Layer 8 w0.1: v5(32.212,5.414) v3(32.212,5.854)
  Bottom Layer w0.1: J4.17@31.502,4.254 31.567,4.319 31.567,4.573 31.587,4.593 31.587,4.83 31.781,5.023 32.056,5.023 32.322,5.29 32.322,5.691 32.212,5.801 v3(32.212,5.854)
BB_CON_CAM1_D1_N: J4.21 U2.E20 | length 13.2
  Layer 7 w0.085: 30.935,13.104 30.935,12.975 30.902,12.942 30.902,10.791 30.647,10.536 30.647,9.573 31.83,8.39 31.83,7.288
  Layer 7 w0.09: v1(30.262,15.404) 30.34,15.404 30.47,15.274 30.697,15.274 30.912,15.059 30.912,13.127 30.935,13.104
  Layer 8 w0.1: v3(31.912,6.704) v5(31.912,7.144)
  Bottom Layer w0.1: J4.21@30.702,4.254 30.637,4.319 30.637,4.573 30.617,4.593 30.617,4.796 30.676,4.854 31.237,4.854 31.651,5.268 31.651,5.541 31.497,5.695 31.497,5.916 31.556,5.974 31.667,5.974 31.912,6.22 v3(31.912,6.704)
BB_CON_CAM1_D1_P: J4.23 U2.D20 | length 13.3
  Layer 7 w0.085: 30.65,13.104 30.65,13.093 30.617,13.06 30.617,12.904 30.617,12.766 30.55,12.699 30.477,12.699 30.41,12.632 30.41,12.431 30.477,12.364 30.55,12.364 30.617,12.297 30.617,12.254 30.617,10.909 30.362,10.654 30.362,9.454 31.545,8.272 31.545,7.288 31.462,7.205 v5(31.462,7.144)
  Layer 7 w0.09: v1(30.262,14.904) 30.34,14.904 30.47,15.034 30.597,15.034 30.672,14.959 30.672,13.127 30.65,13.104
  Layer 8 w0.1: v3(31.462,6.704) v5(31.462,7.144)
  Bottom Layer w0.1: J4.23@30.302,4.254 30.367,4.319 30.367,4.573 30.387,4.593 30.387,4.891 30.581,5.084 31.142,5.084 31.421,5.363 31.421,5.446 31.267,5.599 31.267,6.011 31.461,6.204 31.571,6.204 31.682,6.315 31.682,6.431 31.462,6.651 v3(31.462,6.704)
BB_CON_CAM1_D2_N: J4.33 U2.E24 | length 14.2
  Layer 7 w0.085: v5(28.012,4.964) 28.012,5.025 27.93,5.108 27.93,5.469 27.689,5.71 27.689,10.081 27.777,10.169 28.527,10.169 29.117,10.759 29.117,11.006 29.428,11.317 29.428,13.104
  Layer 7 w0.09: v1(28.262,15.404) 28.34,15.404 28.47,15.274 28.697,15.274 28.902,15.069 28.902,14.214 29.405,13.712 29.405,13.127 29.428,13.104
  Layer 8 w0.1: v5(28.012,4.964) v3(28.012,5.404)
  Bottom Layer w0.1: v3(28.012,5.404) 28.012,5.351 27.902,5.241 27.902,5.083 27.961,5.025 28.022,5.025 28.217,4.83 28.217,4.593 28.237,4.573 28.237,4.319 J4.33@28.302,4.254
BB_CON_CAM1_D2_P: J4.35 U2.D24 | length 14.1
  Layer 7 w0.085: v5(27.562,4.964) 27.562,5.025 27.645,5.108 27.645,5.351 27.404,5.592 27.404,10.199 27.659,10.454 28.409,10.454 28.832,10.878 28.832,11.124 29.143,11.435 29.143,12.261 29.143,12.303 29.076,12.37 29.004,12.37 28.937,12.437 28.937,12.638 29.004,12.705 29.076,12.705 29.143,12.772 29.143,12.904 29.143,13.104
  Layer 7 w0.09: v1(28.262,14.904) 28.34,14.904 28.47,15.034 28.597,15.034 28.662,14.969 28.662,14.115 29.165,13.612 29.165,13.127 29.143,13.104
  Layer 8 w0.1: v5(27.562,4.964) v3(27.562,5.404)
  Bottom Layer w0.1: v3(27.562,5.404) 27.562,5.351 27.672,5.241 27.672,4.988 27.866,4.795 27.927,4.795 27.987,4.734 27.987,4.593 27.967,4.573 27.967,4.319 J4.35@27.902,4.254
BB_CON_CAM1_D3_N: J4.39 U2.E26 | length 14.3
  Layer 7 w0.085: v5(26.812,4.964) 26.812,5.025 26.73,5.108 26.73,5.351 26.962,5.583 26.962,10.401 27.353,10.792 ccw(c27.152,10.994) 27.355,10.794 cw(c27.415,10.734) 27.41,10.819 27.413,10.819 28.08,10.819 28.662,11.401 28.662,13.104
  Layer 7 w0.09: v1(27.262,15.404) 27.34,15.404 27.47,15.274 27.697,15.274 27.902,15.069 27.902,14.236 28.64,13.498 28.64,13.127 28.662,13.104
  Layer 8 w0.1: v5(26.812,4.964) v3(26.812,5.404)
  Bottom Layer w0.1: v3(26.812,5.404) 26.812,5.351 26.702,5.241 26.702,5.099 26.779,5.023 26.824,5.023 27.017,4.83 27.017,4.593 27.037,4.573 27.037,4.319 J4.39@27.102,4.254
BB_CON_CAM1_D3_P: J4.41 U2.D26 | length 14.1
  Layer 7 w0.085: v5(26.362,4.964) 26.362,5.025 26.445,5.108 26.445,5.469 26.677,5.701 26.677,10.519 27.152,10.994 cw(c27.415,10.734) 27.396,11.104 cw(c27.413,10.819) 27.413,11.104 27.962,11.104 28.377,11.519 28.377,13.104
  Layer 7 w0.09: v1(27.262,14.904) 27.34,14.904 27.47,15.034 27.597,15.034 27.662,14.969 27.662,14.136 27.753,14.045 27.785,14.014 28.025,13.773 28.025,13.677 27.954,13.606 27.954,13.51 28.098,13.365 28.195,13.365 28.236,13.406 28.332,13.406 28.4,13.338 28.4,13.192 28.4,13.127 28.377,13.104
  Layer 8 w0.1: v5(26.362,4.964) v3(26.362,5.404)
  Bottom Layer w0.1: v3(26.362,5.404) 26.362,5.351 26.472,5.241 26.472,5.004 26.683,4.793 26.729,4.793 26.787,4.734 26.787,4.593 26.767,4.573 26.767,4.319 J4.41@26.702,4.254
BB_CON_HDMI0_CEC: D5.1 D10.1 J4.51 Q7.3 R174.1 | length 22
  Layer 7 w0.1: v5(10.212,6.334) 10.212,3.554 10.407,3.359 v5(12.772,3.359)
  Layer 8 w0.1: v5(10.212,6.334) v3(10.652,6.334) ; v5(12.772,3.359) v3(13.212,3.359)
  Bottom Layer w0.1: v3(13.212,3.359) 13.217,3.354 14.712,3.354 14.911,3.156 16.269,3.156 cw(c16.269,3.056) 16.34,3.127 16.462,3.004 24.162,3.004 24.702,3.544 J4.51@24.702,4.254
  Bottom Layer w0.2: R174.1@9.102,6.264 9.807,6.264 Q7.3@9.827,6.284 9.852,6.309 10.137,6.309 10.207,6.38 10.648,6.38 D10.1@10.652,6.384 ; D5.1@24.362,5.689 24.362,5.154 24.702,4.814 J4.51@24.702,4.254
BB_CON_HDMI0_CEC_DYN: D10.2 Q7.2 R173.1 U2.AD22 | length 37.9
  Layer 2 w0.1: v6(10.692,7.084) 10.773,7.084 10.871,7.182 10.89,7.182 11.712,8.004 11.712,10.988 11.308,11.392 11.308,12.308 10.712,12.904 10.712,13.404 10.4,13.717 10.4,16.85 12.062,18.512 12.062,21.419 14.048,23.405 16.879,23.405 17.829,24.354 23.112,24.354 23.862,23.604 24.512,23.604 25.142,24.234 26.466,24.234 26.626,24.074 28.432,24.074 v1(29.262,24.904)
  Layer 7 w0.1: v5@10.252,7.084 v6(10.692,7.084)
  Layer 8 w0.1: v5(10.212,7.084) v3(10.652,7.084)
  Bottom Layer w0.15: Q7.2@10.002,6.934 10.002,7.504 R173.1@9.972,7.534 10.452,7.534 10.577,7.409 10.577,7.209 D10.2@10.652,7.134
BB_CON_HDMI0_CLK_N: J4.90 U2.AJ24 | length 66.7
  Top Layer w0.1: v2(27.112,30.504) 27.072,30.464 27.072,30.22 27.587,29.704 28.137,29.704 28.562,29.28 28.562,28.324 28.242,28.004 28.242,27.442 U2.AJ24@28.234,27.433
  Layer 1 w0.1: v2(27.112,30.504) v4(27.112,30.937)
  Layer 2 w0.085: v6@8.212,30.054 8.272,30.115 8.425,30.115 8.562,30.252 8.562,32.558 9.294,33.289 14.727,33.289 15.096,32.921 15.096,32.621 15.335,32.382 19.737,32.382 20.537,33.182 22.237,33.182 22.677,33.623 22.677,34.169 23.212,34.704 24.712,34.704 25.262,34.154 25.262,33.604 26.397,32.469 26.397,31.869 26.397,31.499 26.662,31.234 26.735,31.234 26.744,31.226 26.823,31.226 v4(27.112,30.937)
  Layer 7 w0.085: v6(8.112,30.154) 8.118,30.149 8.118,29.858 7.985,29.725 7.985,28.629 8.311,28.303 8.362,28.251 8.362,27.858 7.912,27.408 7.912,25.365 10.427,22.85 10.427,10.139 14.262,6.304 14.262,2.101 14.961,1.403 15.044,1.319 16.445,1.319 16.662,1.536 16.662,1.948 16.83,2.115 16.9,2.115 17.021,1.994 v5(17.062,1.994)
  Layer 8 w0.1: v5(17.062,1.994) v3(17.062,2.434)
  Bottom Layer w0.1: v3(17.062,2.434) 17.062,2.381 17.187,2.256 17.187,1.883 17.167,1.863 17.167,1.609 J4.90@17.102,1.544
BB_CON_HDMI0_CLK_P: J4.88 U2.AH24 | length 66.6
  Top Layer w0.08: 28.012,27.704 28.012,27.517 28.012,27.154 U2.AH24@28.262,26.904
  Top Layer w0.1: v2(26.612,30.504) 26.829,30.288 26.829,30.177 26.842,30.163 26.842,30.125 27.492,29.474 28.042,29.474 28.332,29.184 28.332,28.954 28.282,28.904 28.121,28.904 28.062,28.846 28.062,28.713 28.121,28.654 28.282,28.654 28.332,28.604 28.332,28.42 28.012,28.1 28.012,27.704
  Layer 1 w0.1: v2(26.612,30.504) v4(26.612,30.937)
  Layer 2 w0.085: v6@8.566,29.701 8.626,29.761 8.626,29.913 8.847,30.134 8.847,32.439 9.412,33.004 14.609,33.004 14.811,32.803 14.811,32.739 14.811,32.503 15.217,32.097 19.855,32.097 20.655,32.897 22.355,32.897 22.962,33.504 22.962,34.051 23.33,34.419 24.594,34.419 24.977,34.036 24.977,33.486 26.112,32.351 26.112,31.988 26.112,31.381 26.557,30.937 v4(26.612,30.937)
  Layer 7 w0.085: v6(8.616,29.651) 8.61,29.657 8.32,29.657 8.27,29.607 8.27,28.747 8.647,28.369 8.647,27.739 8.197,27.289 8.197,25.483 10.712,22.968 10.712,10.258 14.547,6.423 14.547,2.219 15.162,1.604 16.327,1.604 16.377,1.654 16.377,2.066 16.711,2.4 17.107,2.4 v5(17.512,1.994)
  Layer 8 w0.1: v5(17.512,1.994) v3(17.512,2.434)
  Bottom Layer w0.1: 17.417,2.283 17.417,1.883 17.437,1.863 17.437,1.609 J4.88@17.502,1.544
BB_CON_HDMI0_HOTPLUG: D6.1 J4.53 R167.2 U22.A1 | length 23.9
  Layer 7 w0.1: v5(12.101,5.953) 11.711,5.953 11.262,5.504 11.262,4.104 11.562,3.804 13.367,3.804 v5(13.662,4.099)
  Layer 8 w0.1: v5(12.101,5.953) v3(12.412,6.264) ; v3(13.662,3.659) v5(13.662,4.099)
  Bottom Layer w0.1: R167.2@11.832,6.284 11.867,6.25 v3@12.4,6.25 ; U22.A1@12.1,9.6 12.3,9.6 12.5,9.4 12.5,8.658 12.287,8.445 12.195,8.445 12,8.25 12,6.95 12.4,6.55 v3@12.4,6.3 ; v3(13.662,3.659) 13.667,3.654 14.812,3.654 14.969,3.497 15.249,3.497 15.369,3.618 16.399,3.618 16.662,3.354 24.012,3.354 24.302,3.644 J4.53@24.302,4.254
  Bottom Layer w0.2: D6.1@23.512,5.689 23.558,5.689 23.558,5.461 24.298,4.721 24.298,4.259 J4.53@24.302,4.254
BB_CON_HDMI0_HPD_DYN: R168.1 U2.AE22 U22.B2 | length 37.2
  Layer 2 w0.1: v6(10.952,8.134) 11.412,8.594 11.412,10.938 11.05,11.3 11.05,12.167 10.412,12.804 10.412,13.254 10.1,13.567 10.1,16.95 11.712,18.562 11.712,21.502 13.915,23.705 16.755,23.705 17.704,24.654 23.362,24.654 24.012,24.004 24.507,24.004 25.057,24.554 26.412,24.554 26.612,24.754 27.879,24.754 28.059,24.574 28.399,24.574 28.772,24.948 28.772,25.014 29.065,25.307 29.084,25.307 29.181,25.404 v1(29.262,25.404)
  Layer 7 w0.1: v6(10.952,8.134) v5(11.392,8.134)
  Layer 8 w0.1: v5(11.392,8.134) 11.6,8.342 v3(11.6,8.6)
  Bottom Layer w0.1: R168.1@11.6,7.6 v3(11.6,8.6) U22.B2@11.6,9.1
BB_CON_HDMI0_SCL: D8.1 J4.100 R170.1 TP105.TP U18.7 | length 6.5
  Bottom Layer w0.1: U18.7@10.812,3.804 11.362,3.804 11.762,3.404 11.842,3.324 D8.1@12.662,3.324 ; R170.1@11.142,3.054 11.512,3.054 TP105.TP@11.812,3.354 ; D8.1@12.712,3.324 12.762,3.274 12.762,3.224 12.932,3.054 14.442,3.054 15.102,2.394 J4.100@15.102,1.544
BB_CON_HDMI0_SCL_DYN: R171.1 U2.AC22 U18.2 | length 41
  Layer 2 w0.1: v6(8.858,3.828) 9.412,4.382 9.412,6.054 10.067,6.709 10.389,6.709 10.394,6.704 11.112,6.704 12,7.592 12,11.05 11.9,11.15 11.583,11.467 11.583,12.483 11.062,13.004 11.062,13.549 10.7,13.912 10.7,16.75 12.45,18.5 12.45,21.374 14.181,23.105 17.003,23.105 17.953,24.054 22.962,24.054 23.717,23.3 25.3,23.3 25.55,23.55 26.441,23.55 26.696,23.804 28.662,23.804 v1(29.262,24.404)
  Layer 7 w0.1: v5(8.547,4.139) v6(8.858,3.828)
  Layer 8 w0.1: v5(8.547,4.139) v3(8.987,4.139)
  Bottom Layer w0.1: v3(8.987,4.139) 9.267,4.139 9.372,4.244 9.552,4.244 U18.2@9.612,4.304